# EAGLE board Placa_SecadorDeGraos (EAGLE 9.2.0)
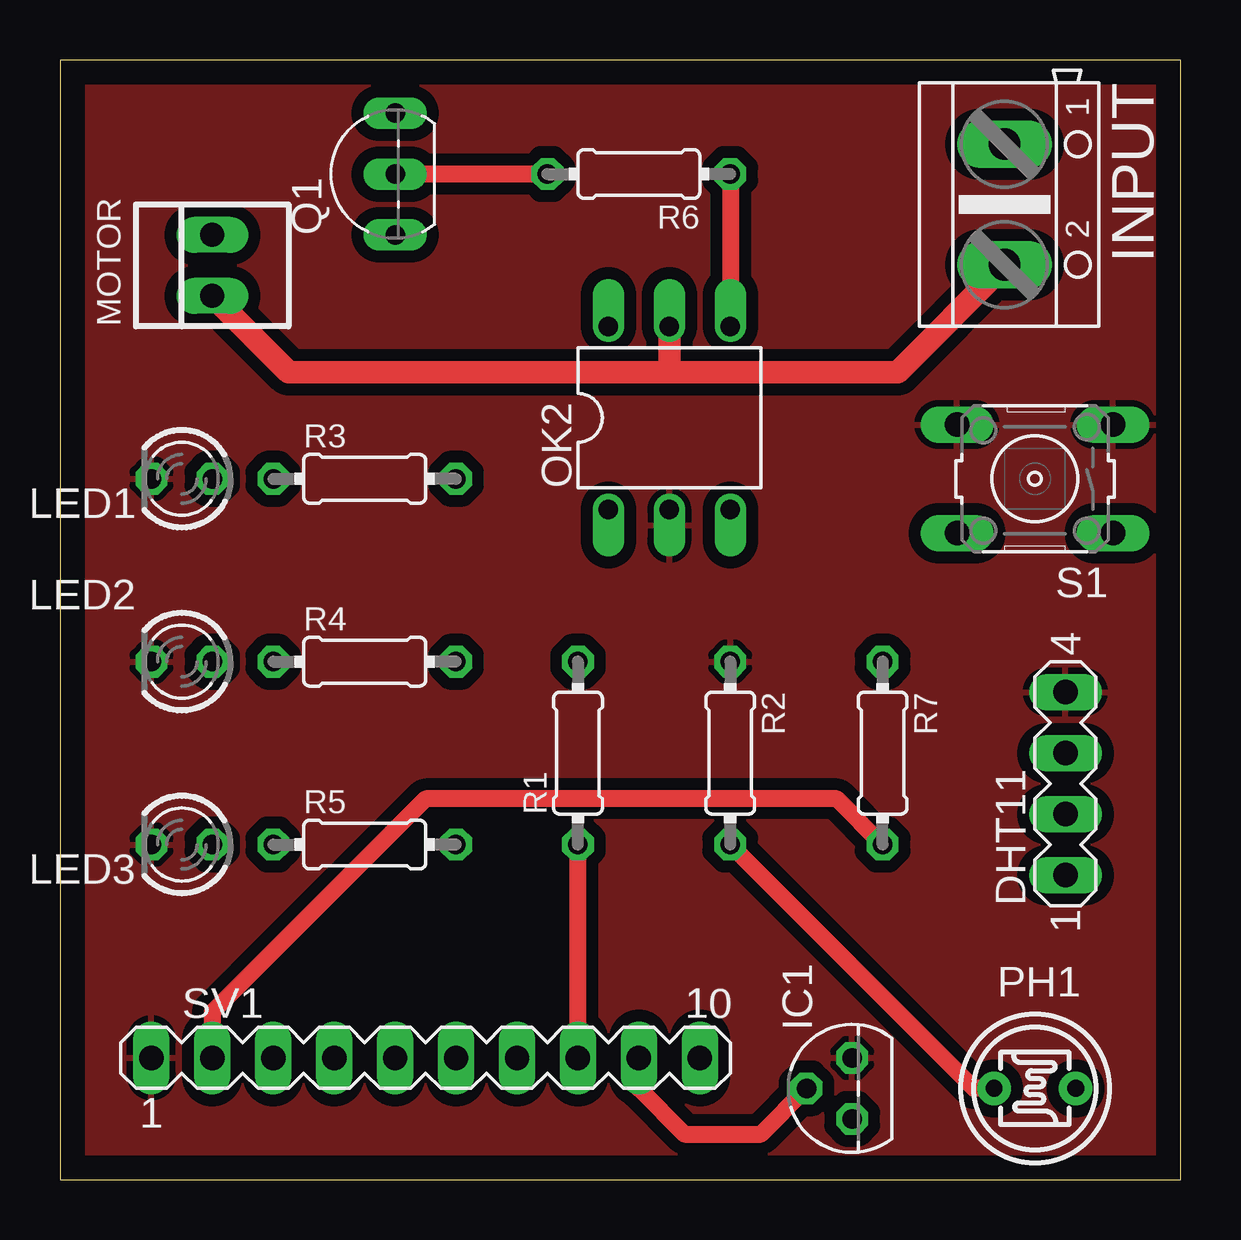
[diagram p0: board, top side]
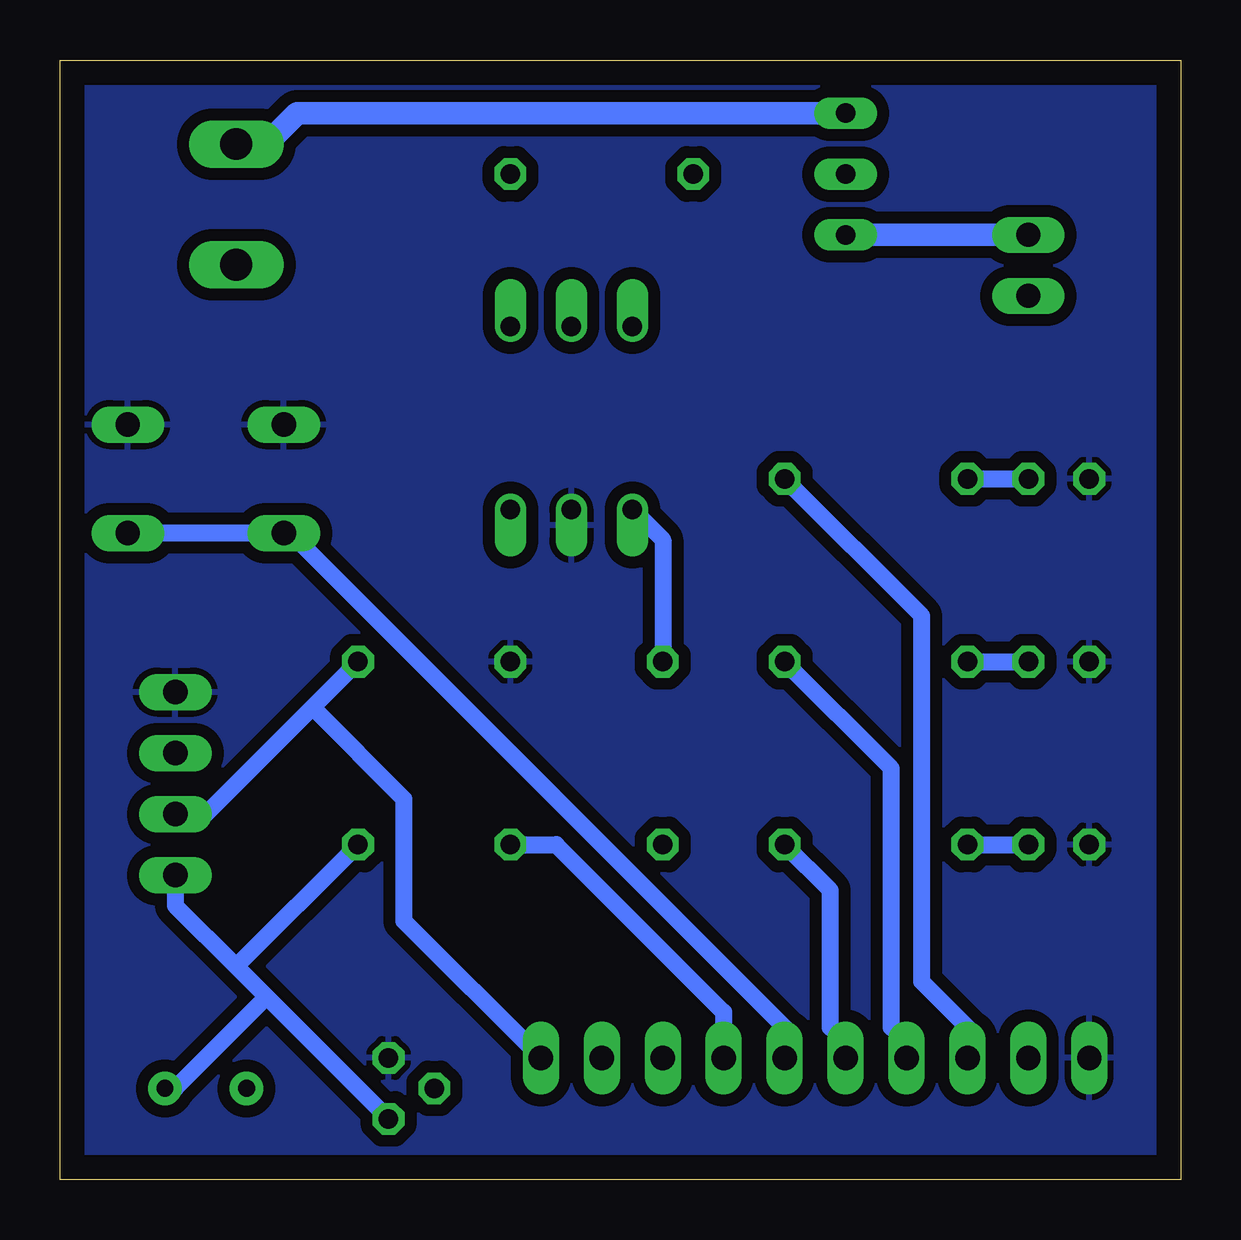
[diagram p1: board, bottom side, seen from below]

Size 46.72 x 46.66 mm. Coordinates in mm from the lower left corner, seen from the top.
Outline: 0,0 46.72,0 46.72,46.66 0,46.66 0,0
Copper layers (1*16): Top 0.035mm / dielectric 1.5mm / Bottom 0.035mm
Design rules "default *": minimum track width 0.7mm, minimum drill 0.7mm, track to track 0.5mm, track to pad 0.3mm, pad to pad 0.25mm, via to via 0.25mm, smd to smd 6mil, copper to edge 40mil, drill to drill 6mil, minimum pad ring 10mil, minimum via ring 8mil, stop-mask expansion 4mil, vias tented up to drill 0mil, thermal gap 10mil

## Footprints (pad centres in the part's own frame; a part is rotated, then mirrored left to right if it is on the bottom)
MA04-1 = drill 1.016 long: 1 -3.81,0; 2 -1.27,0; 3 1.27,0; 4 3.81,0
TO92 = drill 0.813 octagon: 1 -1.27,0; 2 0,1.905; 3 1.27,0
AK500/2 = drill 1.321 long: 1 -2.515,0; 2 2.515,0
LED3MM = drill 0.813 octagon: A -1.27,0; K 1.27,0
22-23-2021 = drill 1 long: 1 -1.27,0; 2 1.27,0
DIL06 = drill 0.813 offset: 1 -2.54,-3.81; 2 0,-3.81; 3 2.54,-3.81; 4 2.54,3.81; 5 0,3.81; 6 -2.54,3.81
T0-46-A10XX = drill 0.7 pad 1.4: 1 -1.7,0; 2 1.7,0
TO92-EBC = drill 0.813 long: B 0,-1.27; C -2.54,-1.27; E 2.54,-1.27
0204/7 = drill 0.813 octagon: 1 -3.81,0; 2 3.81,0
B3F-10XX = drill 1.016 long: 1 -3.251,2.261; 2 3.251,2.261; 3 -3.251,-2.261; 4 3.251,-2.261
MA10-1 = drill 1.016 long: 1 -11.43,0; 2 -8.89,0; 3 -6.35,0; 4 -3.81,0; 5 -1.27,0; 6 1.27,0; 7 3.81,0; 8 6.35,0; 9 8.89,0; 10 11.43,0

## Placement (x,y rotation side)
DHT11  [MA04-1]  41.91,16.51 90 top
IC1  LM35CZ  [TO92]  33.02,3.81 90 top
INPUT  [AK500/2]  39.37,40.64 270 top
LED1  TLLG4400  [LED3MM]  5.08,29.21 180 top
LED2  TLLG4400  [LED3MM]  5.08,21.59 180 top
LED3  TLLG4400  [LED3MM]  5.08,13.97 180 top
MOTOR  22-23-2021  [22-23-2021]  6.35,38.1 90 top
OK2  4N35  [DIL06]  25.4,31.75 0 top
PH1  A1050_09  [T0-46-A10XX]  40.64,3.81 180 top
Q1  BC548  [TO92-EBC]  12.7,41.91 90 top
R1  [0204/7]  21.59,17.78 90 top
R2  [0204/7]  27.94,17.78 270 top
R3  [0204/7]  12.7,29.21 0 top
R4  [0204/7]  12.7,21.59 0 top
R5  [0204/7]  12.7,13.97 0 top
R6  [0204/7]  24.13,41.91 180 top
R7  [0204/7]  34.29,17.78 270 top
S1  [B3F-10XX]  40.64,29.21 180 top
SV1  [MA10-1]  15.24,5.08 0 top

## Library data of the parts
DHT11 SV1 = con-lstb; OC_FARNELL: unknown; OC_NEWARK: unknown
IC1 = lm35
INPUT = con-ptr500; OC_FARNELL: unknown; OC_NEWARK: unknown
LED1-LED3 = led; MF: VISHAY SEMICONDUCTOR; OC_FARNELL: 1612435
MOTOR = con-molex; MF: MOLEX; MPN: 22-23-2021; OC_FARNELL: 1462926; OC_NEWARK: 25C3832
OK2 = optocoupler; MF: FAIRCHILD SEMICONDUCTOR; MPN: 4N35; OC_FARNELL: 1328375; OC_NEWARK: 72K9946
PH1 = photo-elements
Q1 = transistor-npn
R1-R7 = rcl; SPICEPREFIX: R
S1 = switch-omron; MPN: B3F-1000; OC_FARNELL: 176432; OC_NEWARK: 36M3542

## Nets
+5V: DHT11.1 IC1.1 PH1.1 R7.2 SV1.2
CH1: S1.1 S1.2 SV1.6
DHT: DHT11.2 R7.1 SV1.10
DRV: R1.1 SV1.8
GND: DHT11.4 IC1.3 LED1.K LED2.K LED3.K OK2.2 R2.1 S1.3 S1.4 SV1.1
L1: R3.2 SV1.3
L2: R4.2 SV1.4
L3: R5.2 SV1.5
LDR: PH1.2 R2.2 SV1.7
N$1: LED1.A R3.1
N$2: LED2.A R4.1
N$3: LED3.A R5.1
N$4: MOTOR.2 Q1.C
N$5: OK2.1 R1.2
N$6: Q1.B R6.2
N$7: OK2.4 R6.1
N$8: INPUT.2 MOTOR.1 OK2.5
N$10: INPUT.1 Q1.E
TMP: IC1.2 SV1.9

## Tracks (layer width: path | path; a pad name or v marks a point on that pad's centre or on a via)
+5V
  Top 0.7: SV1.2 6.35,6.99 15.24,15.88 32.38,15.88 R7.2
  Bottom 0.7: 39.37,8.89 41.91,11.43 DHT11.1 | 39.37,8.89 38.1,7.62 | 38.1,7.62 IC1.1 | 39.37,8.89 R7.2 | 38.1,7.62 41.91,3.81 PH1.1
CH1
  Bottom 0.7: S1.1 S1.2 37.11,26.95 16.51,6.35 SV1.6
DHT
  Bottom 0.7: 36.2,19.68 40.64,15.24 DHT11.2 | 36.2,19.68 R7.1 | SV1.10 32.38,10.79 32.38,15.88 36.2,19.68
DRV
  Top 0.7: SV1.8 R1.1
GND
  pour Top: 0,0 46.99,0 46.99,46.99 0,46.99
  pour Bottom: 0,0 48.26,0 48.26,46.99 0,46.99
L1
  Bottom 0.7: R3.2 10.79,23.5 10.79,8.26 8.89,6.35 SV1.3
L2
  Bottom 0.7: R4.2 12.06,17.14 12.06,6.35 11.43,5.71 SV1.4
L3
  Bottom 0.7: R5.2 14.61,12.06 14.61,6.35 13.97,5.71 SV1.5
LDR
  Top 0.7: R2.2 38.1,3.81 PH1.2
  Bottom 0.7: SV1.7 19.05,6.99 26.04,13.97 R2.2
N$1
  Bottom 0.7: R3.1 LED1.A
N$2
  Bottom 0.7: R4.1 LED2.A
N$3
  Bottom 0.7: R5.1 LED3.A
N$4
  Bottom 0.94: MOTOR.2 Q1.C
N$5
  Bottom 0.7: R1.2 21.59,26.67 OK2.1
N$6
  Top 0.7: R6.2 Q1.B
N$7
  Top 0.7: R6.1 OK2.4
N$8
  Top 0.7: 39.37,38.1 INPUT.2
  Top 0.94: 39.37,38.1 34.92,33.66 25.4,33.66 | MOTOR.1 9.53,33.66 25.4,33.66 | OK2.5 25.4,33.66
N$10
  Bottom 0.7: 39.37,43.18 INPUT.1
  Bottom 0.94: Q1.E 36.83,44.45 38.1,43.18 39.37,43.18
TMP
  Top 0.7: IC1.2 29.21,1.91 26.04,1.91 24.13,3.81 SV1.9